# Altium PCB LHCbit.PcbDoc
Units mm, origin at the board's own origin, x right, y up, seen from the top; angles counter-clockwise.
Board outline 51.6 x 44.4 mm, 4 copper layers (Top Layer, Layer 1, Layer 2, Bottom Layer), stack 1.588 mm thick; 50 components, 46 nets, 300 pads, 302 vias.
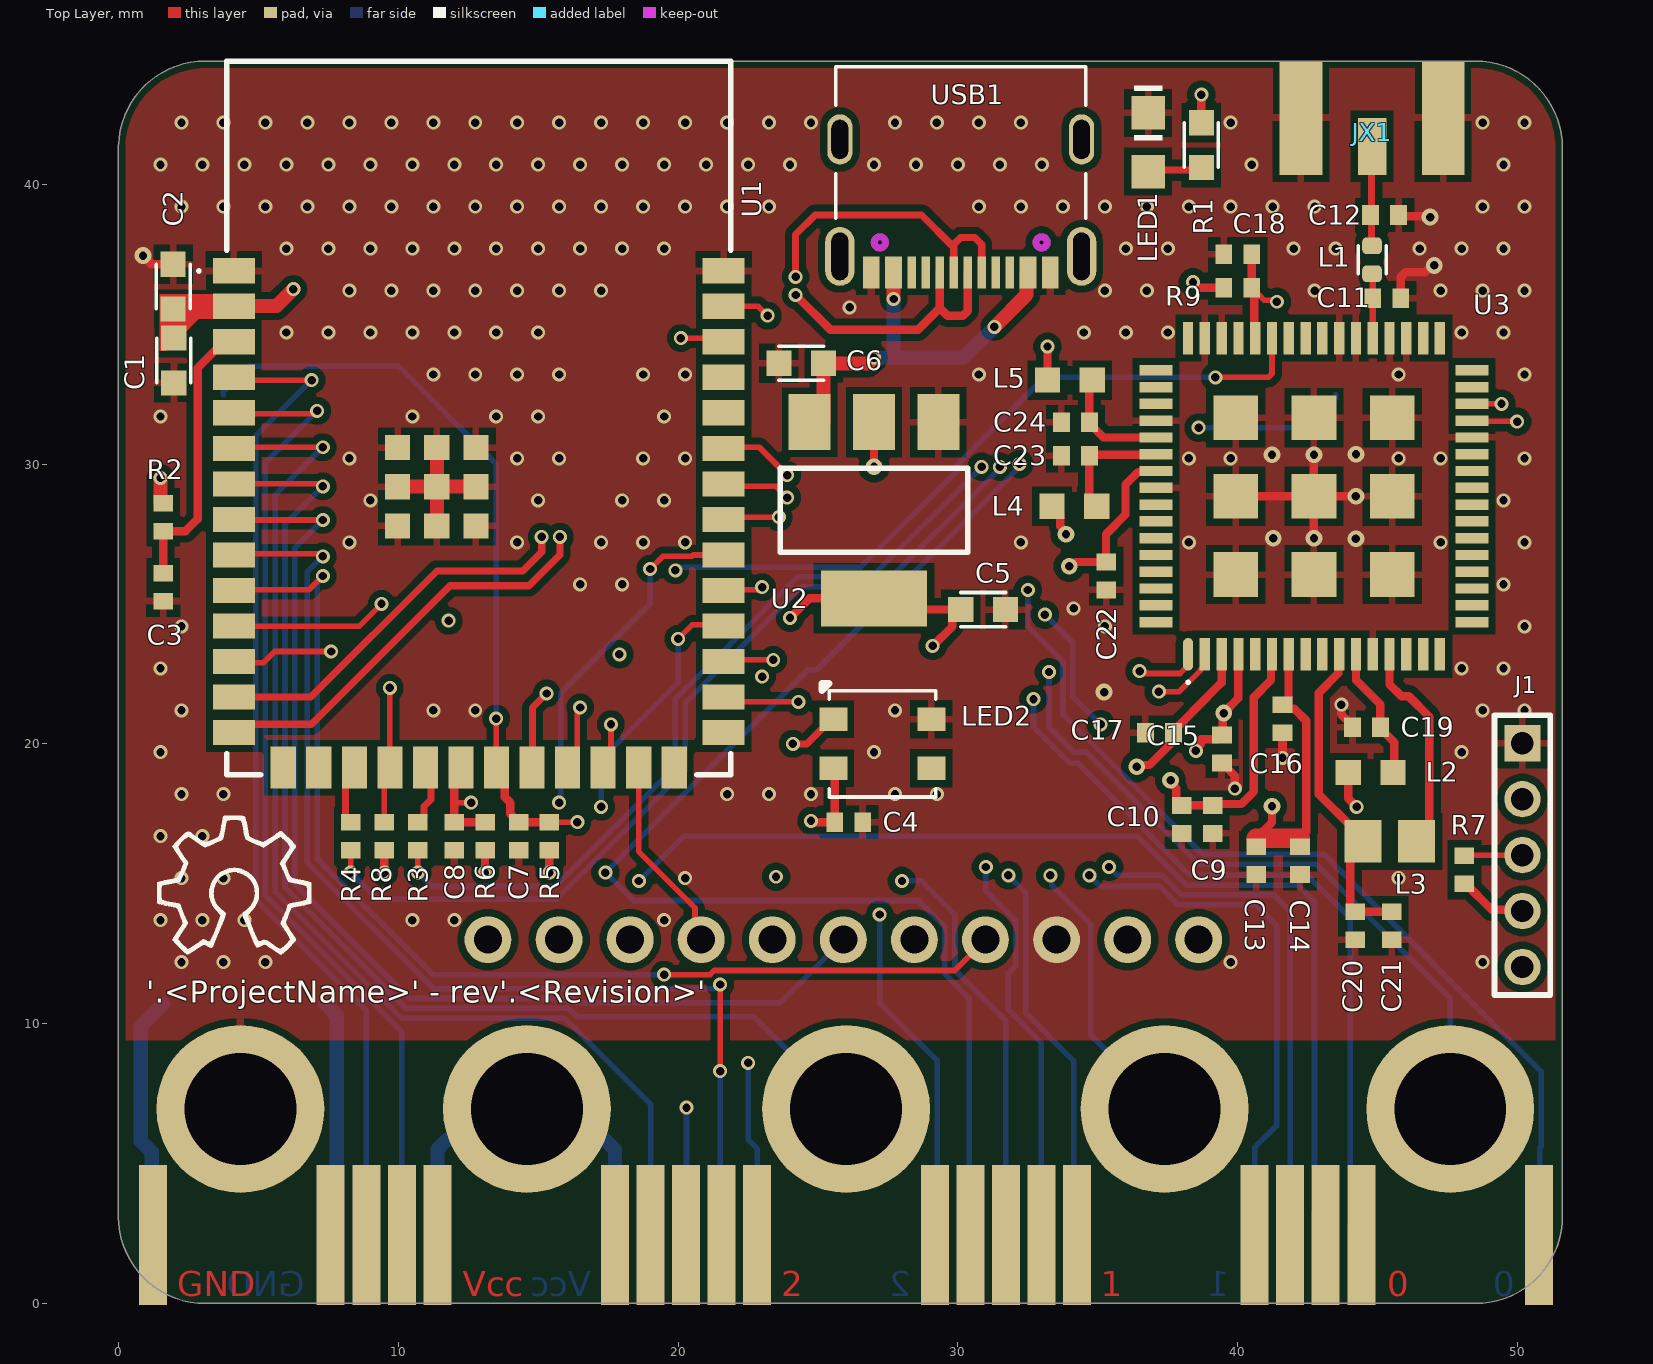
[diagram p0: Top Layer view]
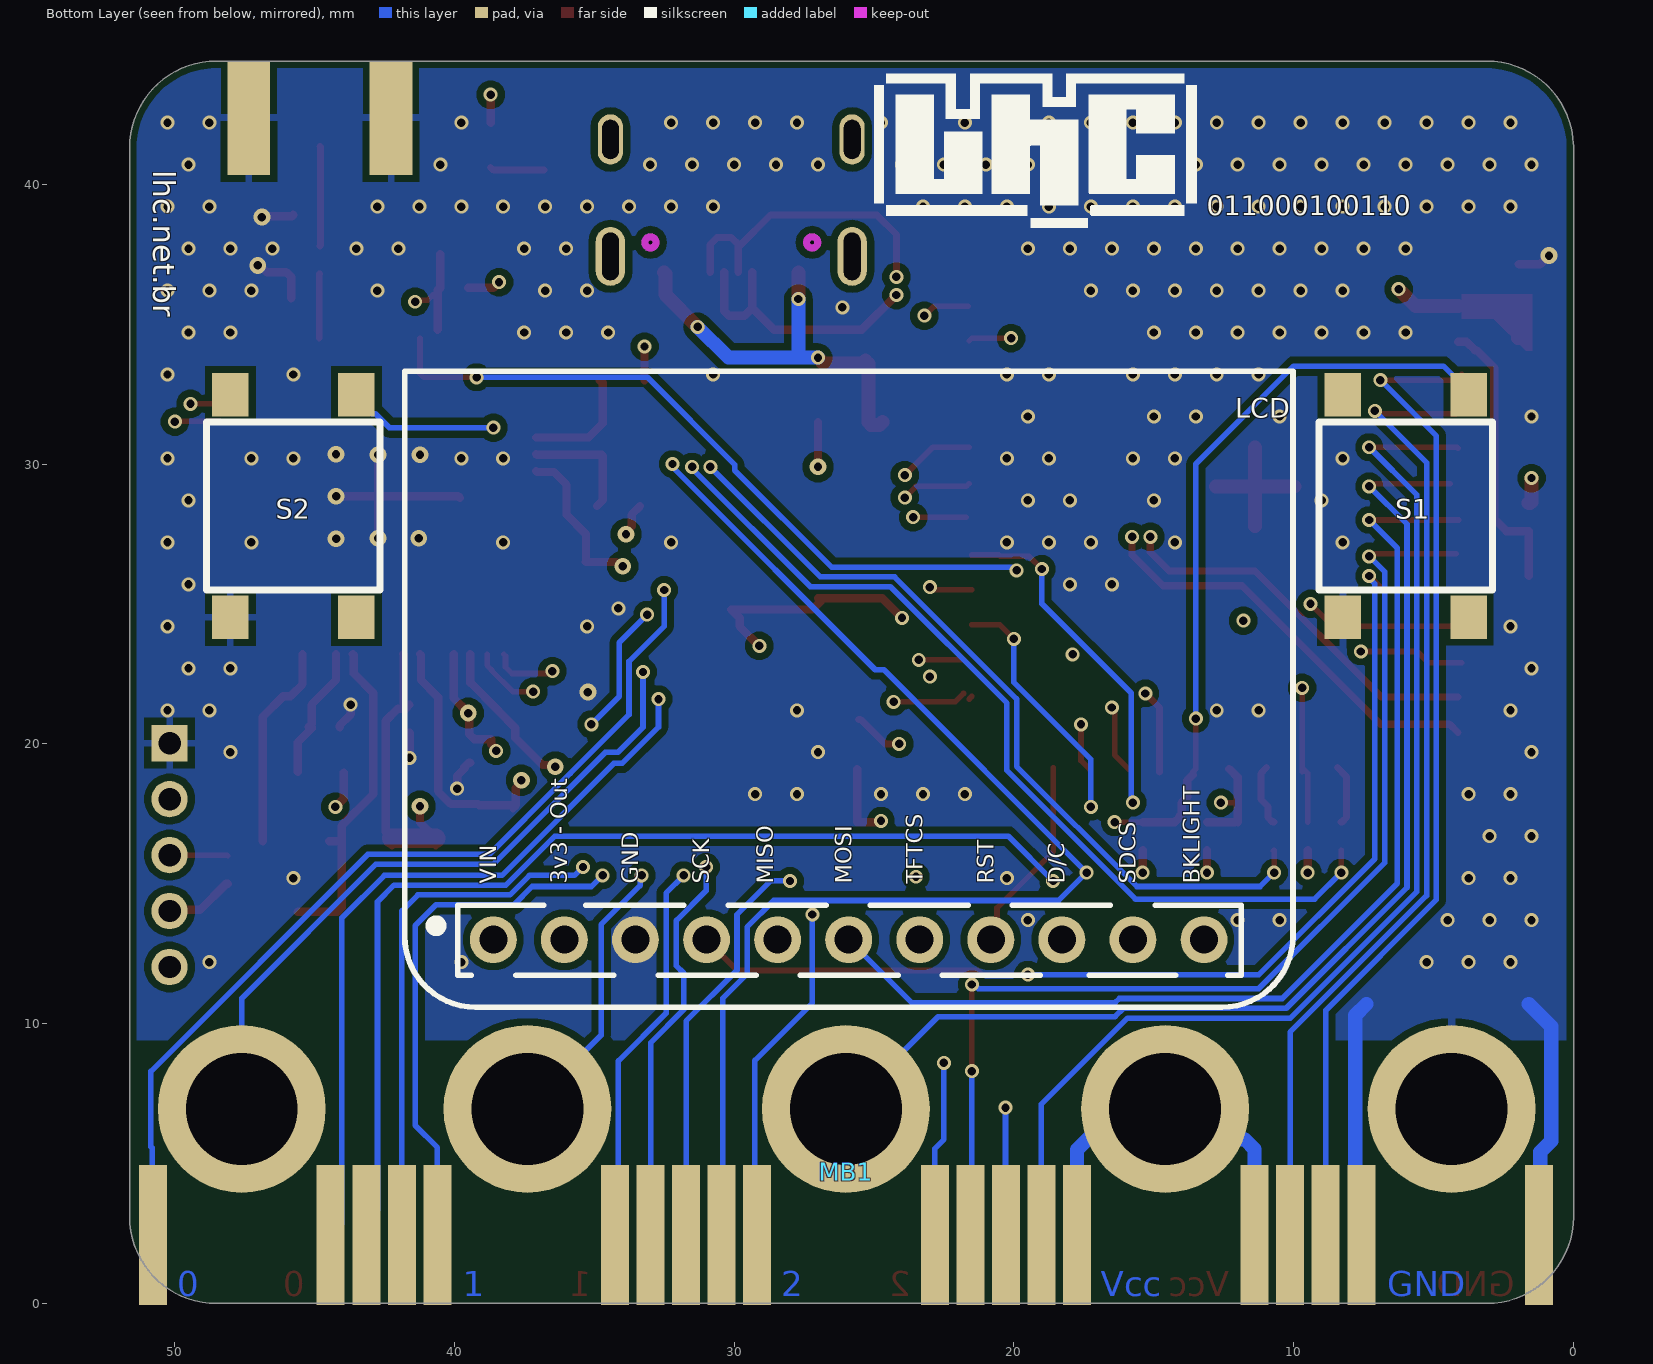
[diagram p1: Bottom Layer view, seen from below]
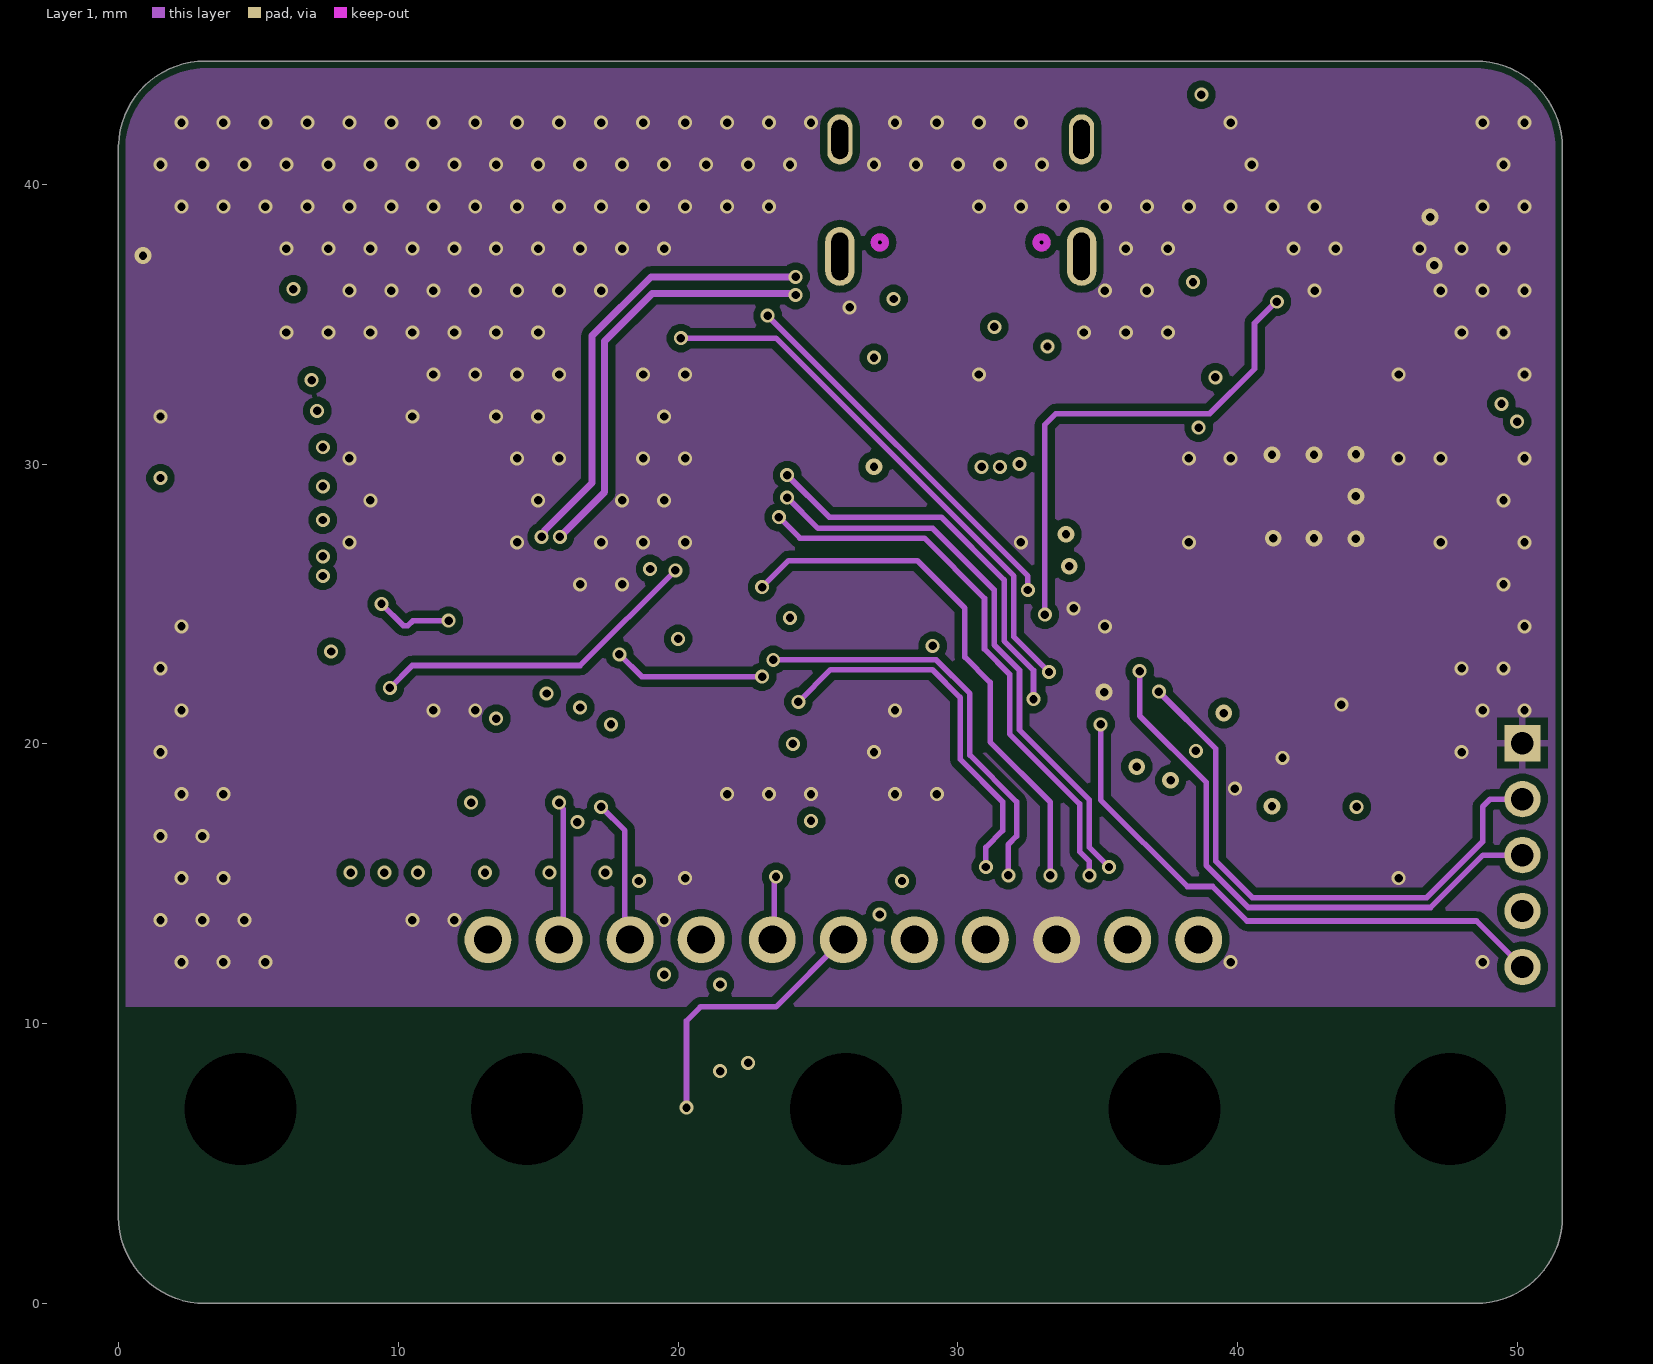
[diagram p2: Layer 1]
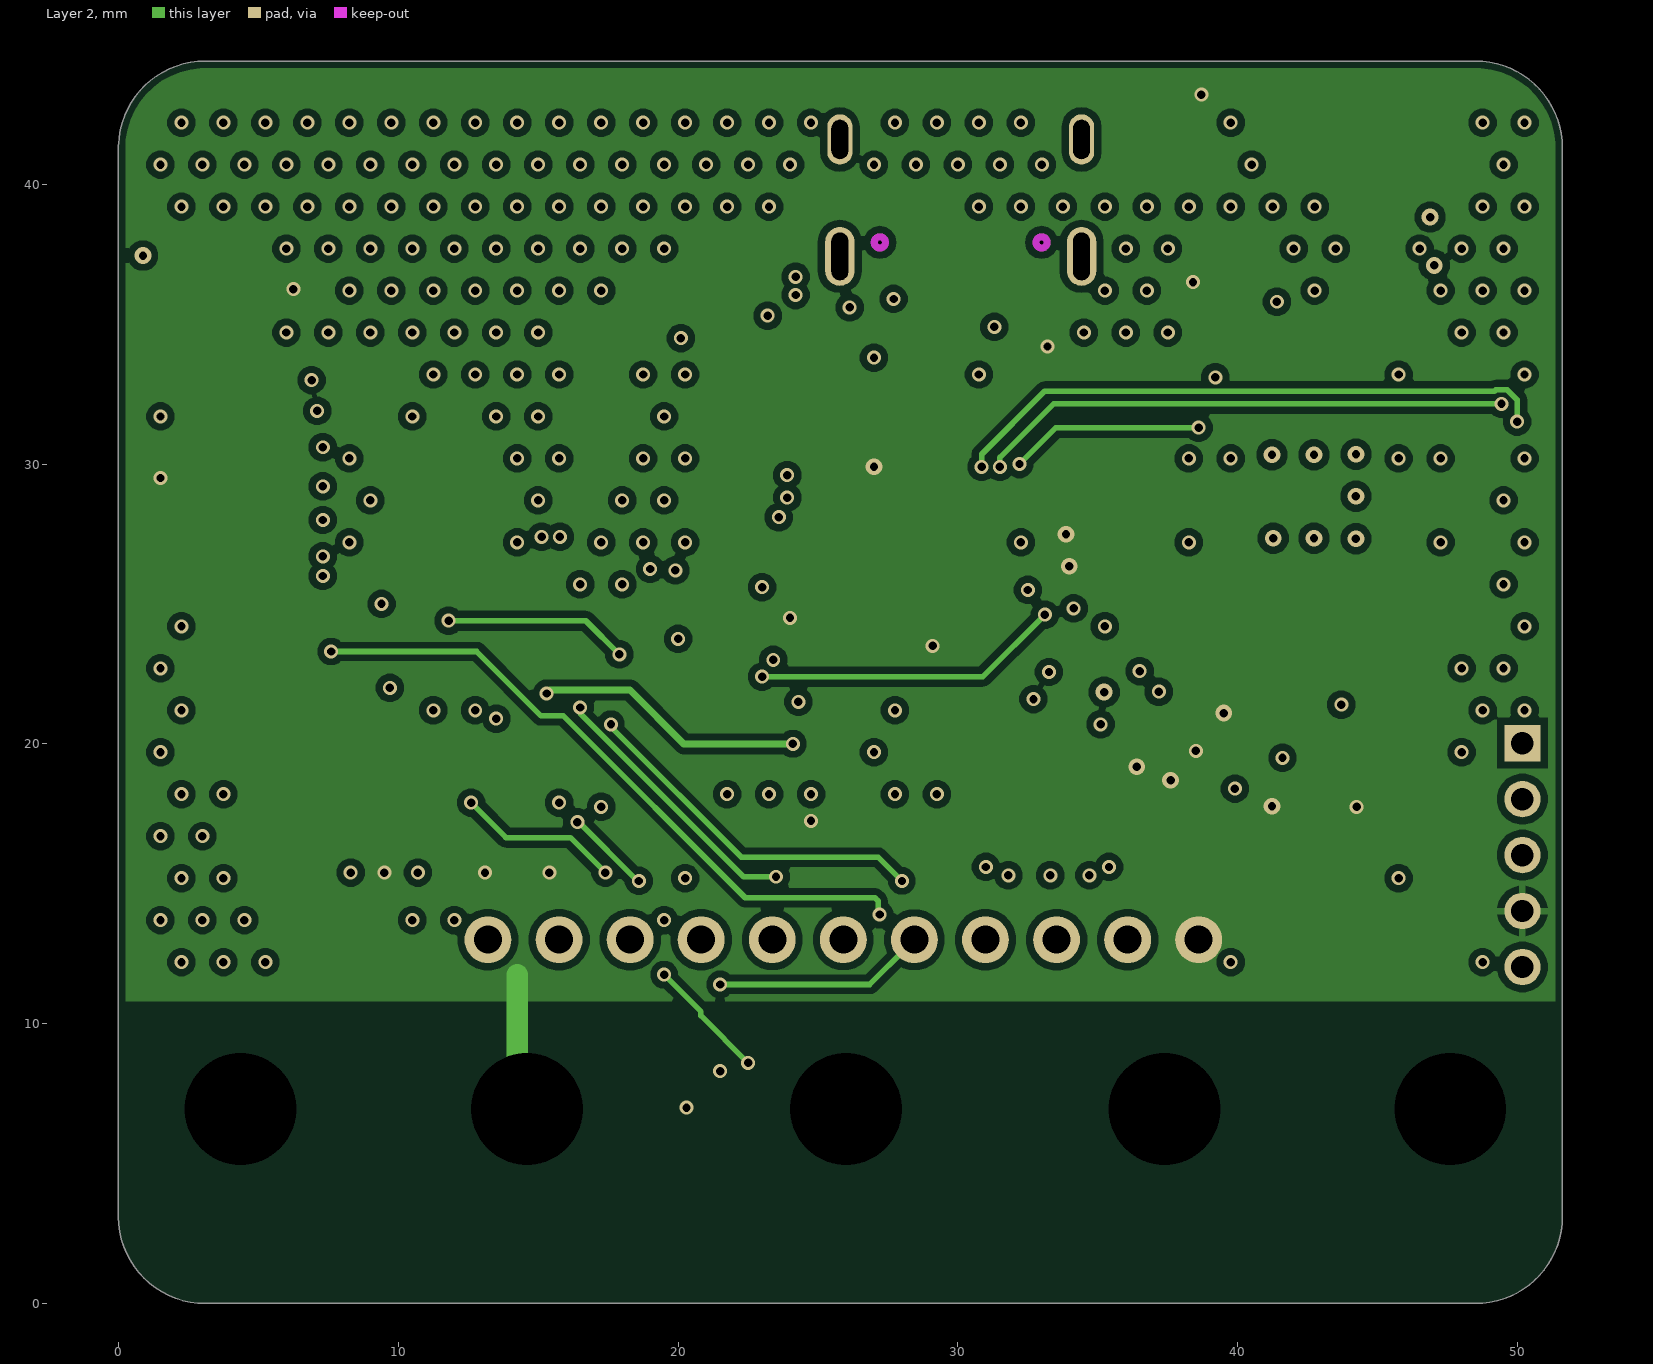
[diagram p3: Layer 2]

## Layer stack, top to bottom
Top Solder: solder mask 0.0254, SM-001, Dk 4
Top Layer: signal copper 0.035
Dielectric 2: prepreg 0.2083, PP-022, Dk 4.5
Layer 1: signal copper 0.018
Dielectric 1: core 1.065, Core-043, Dk 4.3
Layer 2: signal copper 0.018
Dielectric 3: prepreg 0.2083, PP-022, Dk 4.5
Bottom Layer: signal copper 0.035
Bottom Solder: solder mask 0.0254, SM-001, Dk 4

## Board outline
0,3.1 ccw(c3.1,3.1) 3.1,0 48.5,0 ccw(c48.5,3.1) 51.6,3.1 51.6,41.299 51.6,41.3 ccw(c48.5,41.3) 48.5,44.4 3.1,44.4 ccw(c3.1,41.3) 0.002,41.422 0,41.4

## Design rules (kind name [scope] priority, off if disabled: settings)
BoardOutlineClearance [All] p1: gap=0.254 ignorepadtopadclearanceinfootprint=FALSE except(0: Arc-SplitContinuation Track-SplitContinuation SMDPad-OutlineEdge SMDPad-SplitContinuation THPad-SplitContinuation Via-SplitContinuation Fill-SplitContinuation Poly-SplitContinuation Region-SplitContinuation Text-SplitContinuation; 0.1: Track-OutlineEdge Text-OutlineEdge; 0.2: Text-CavityEdge Text-CutoutEdge Text-SplitBarrior)
Clearance RF [InNetClass('50Ohms')] p1: gap=0.152 ignorepadtopadclearanceinfootprint=FALSE except(0: Arc-Hole Track-Hole SMDPad-Hole THPad-Hole Via-Hole Fill-Hole Poly-Hole Region-Hole Text-Hole; 0.127: Arc-Fill Arc-Poly Arc-Region Track-Via Track-Fill Track-Poly Track-Region Track-Text SMDPad-Via SMDPad-Fill SMDPad-Poly SMDPad-Region; 0.254: Track-THPad; 0.305: THPad-Poly Via-Poly Fill-Poly Fill-Region Poly-Poly Poly-Region)
Clearance [All] p2: gap=0.15 ignorepadtopadclearanceinfootprint=FALSE except(0: Arc-Hole Track-Hole SMDPad-Hole THPad-Hole Via-Hole Fill-Hole Poly-Hole Region-Hole Text-Hole; 0.25: Arc-Poly Track-Poly SMDPad-Poly THPad-Poly Via-Poly Fill-Poly Poly-Poly)
DiffPairsRouting [All] p1: maxlimit=0.254 minlimit=0.25 mostfreqgap=0.254 toplayer_prefgap=0.25 toplayer_minwidth=0.25 toplayer_maxwidth=0.25 toplayer_prefwidth=0.25 midlayer1_mingap=0.254 midlayer1_minwidth=0.381 midlayer1_maxwidth=0.381 midlayer1_prefwidth=0.381 midlayer2_mingap=0.254 midlayer2_minwidth=0.381 midlayer2_maxwidth=0.381 midlayer2_prefwidth=0.381 bottomlayer_prefgap=0.25 bottomlayer_minwidth=0.25 bottomlayer_maxwidth=0.25 bottomlayer_prefwidth=0.25 maxuncoupledlength=12.7
HoleSize [IsVia] p1: absolutevalues=TRUE maxlimit=10 minlimit=0.025 maxpercent=80.000 minpercent=20.000
MinimumSolderMaskSliver [All] p1: minsoldermaskwidth=0
PlaneClearance PlaneClearance_RF [InNet('WLAN_RF')] p1: clearance=0.8
PlaneClearance [All] p2: clearance=0.5
PlaneConnect [All] p1: planeconnectstyle=Relief reliefexpansion=0.508 reliefentries=2 reliefconductorwidth=0.254 reliefairgap=0.254
PolygonConnect PolygonConnect_vias [All vs IsVia] p1: connectstyle=Direct reliefconductorwidth=0.254 reliefentries=4 polygonreliefangle="90 Angle" airgapwidth=0.254
PolygonConnect [All] p2: connectstyle=Relief reliefconductorwidth=0.25 reliefentries=4 polygonreliefangle="90 Angle" airgapwidth=0.25
RoutingVias [All] p1: holewidth=0.3 width=0.6 viastyle="Through Hole" minholewidth=0.3 minwidth=0.5 maxholewidth=0.5 maxwidth=0.8 viatemplateguid#1={8426FDED-F5BA-4CAB-9141-54A8BC6DD2D3} viatemplateguid#2={668211A3-BF85-4814-A931-83ECD4CAE96E} viatemplateguid#3={DD99C7B2-69A4-4F03-96B4-6F71CC3A3FCA} viatemplatename#1=v60h30 viatemplatename#2=v50h30 viatemplatename#3=v45h31(1)
SilkToSilkClearance [All] p1: silktosilkclearance=0.001
SilkToSolderMaskClearance [IsPad] p1: minsilkscreentomaskgap=0 clearancetoexposedcopper=TRUE
SolderMaskExpansion SolderMaskExpansion_Vias [IsVia] p1: expansion=-10 istentingtop=FALSE
SolderMaskExpansion [All] p2: expansion=0.1 istentingtop=FALSE
UnpouredPolygon [All] p1: allowunpoured=TRUE allowshelved=TRUE
Width RF_1 [InNetClass('50Ohms')] p1: maxlimit=0.254 minlimit=0.225 preferedwidth=0.254 toplayer_maxwidth=0.225 toplayer_prefwidth=0.225 bottomlayer_maxwidth=0.225 bottomlayer_prefwidth=0.225 impedanceprofiledriven=TRUE impedanceprofileid={D2F659F8-A690-4C51-8CE7-47CDAA934BD5} impedanceprofilevalue=50.000000 minimp=50.000000 maximp=50.000000 favimp=50.000000
Width [All] p2: maxlimit=3.556 minlimit=0.1 preferedwidth=0.2 toplayer_minwidth=0.15 midlayer1_maxwidth=2 midlayer2_maxwidth=2 bottomlayer_minwidth=0.15 minimp=50.000000 maximp=50.000000 favimp=50.000000
22 further rules are at their usual default settings.

## Classes and differential pairs
net class 50Ohms: RF_Output
component class STM32WL_LHCbit: C9 C10 C11 C12 C13 C14 C15 C16 C17 C18 C19 C20 C21 C22 C23 C24 J1 JX1 L1 L2 L3 L4 L5 R7 R8 R9 U3
component class ESP32_LHCbit: C1 C2 C3 C4 C5 C6 C7 C8 LCD LED1 LED2 MB1 R1 R2 R3 R4 R5 R6 S1 S2 U1 U2 USB1

## Components (designator, comment, footprint, x,y, rotation, side; value= is the part's Value field where it differs from the comment)
C1 "C-EUC0603" C0603 1.975,33.7 r270 top value=10uF
C2 "C-EUC0603" C0603 1.953,36.343 r90 top value=100nF
C3 "C-EUC0402" C0402 1.6,25.6 r270 top value=100nF
C4 "C-EUC0402" C0402 26.1,17.2 r180 top value=100nF
C5 "C-EUC0603" C0603 30.9,24.8 r0 top value=1uF
C6 "C-EUC0603" C0603 24.4,33.6 r180 top value=1uF
C7 "C-EUC0402" C0402 14.3,16.7 r270 top value=100nF
C8 "C-EUC0402" C0402 12,16.7 r270 top value=100nF
C9 "C-EUC0402" C0402 39.1,17.3 r270 top value=1uF
C10 "C-EUC0402" C0402 38,17.3 r270 top value=100nF
C11 "C-EUC0402" C0402 45.325,35.925 r180 top value=3.3pF
C12 "C-EUC0402" C0402 45.25,38.9 r180 top value=3.3pF
C13 "C-EUC0402" C0402 40.662,15.826 r270 top value=1uF
C14 "C-EUC0402" C0402 42.225,15.826 r270 top value=100nF
C15 "C-EUC0402" C0402 39.436,19.819 r270 top value=1uF
C16 "C-EUC0402" C0402 41.6,20.9 r270 top value=100nF
C17 "C-EUC0402" C0402 37.2,20.4 r180 top value=4.7uF
C18 "C-EUC0402" C0402 40,37.5 r180 top value=100nF
C19 "C-EUC0402" C0402 44.6,20.6 r180 top value=100nF
C20 "C-EUC0402" C0402 44.2,13.5 r270 top value=470nF
C21 "C-EUC0402" C0402 45.5,13.5 r270 top value=100nF
C22 "C-EUC0402" C0402 35.3,26 r270 top value=100nF
C23 "C-EUC0402" C0402 34.2,30.3 r180 top value=1uF
C24 "C-EUC0402" C0402 34.2,31.5 r180 top value=1uF
J1 "62000511121" 62000511121 50.175,15.025 r270 top value=5
JX1 "SMACONNECTOR_EDGE_UFL" SMA_EDGELAUNCH_UFL 44.8,44.4 r270 top
L1 "Ferrite bead 0402" "L0402 - rounded" 44.8,37.3 r90 top value="8.7 nH"
L2 "Ferrite bead 0603" L0603 44.75,18.975 r0 top value="120 ohm"
L3 "" L0805 45.425,16.512 r0 top value=15uH
L4 "Ferrite bead 0603" L0603 34.163,28.49 r0 top value="120 ohm"
L5 "Ferrite bead 0603" L0603 34,33 r0 top value="120 ohm"
LCD "Adafruit 0.96\"  TFT LCD" "ADafruit 0.96 Display" 25.9,13 r180 bottom
LED1 "" CHIPLED_0805 36.8,41.5 r0 top
LED2 "SK6812MINI_NOPoly" WS2812BMINI_no_poly 27.3,20 r180 top
MB1 "MICRO:BIT_EDGE" MICROBIT_EDGE 26,0 r180 bottom
R1 "R-US_R0603" R0603 38.7,41.4 r90 top value=470
R2 "R-US_R0402" R0402 1.6,28.1 r90 top value=10k
R3 "R-US_R0402" R0402 10.7,16.7 r270 top value=0
R4 "R-US_R0402" R0402 8.3,16.7 r270 top value=0
R5 "R-US_R0402" R0402 15.4,16.7 r270 top value=10k
R6 "R-US_R0402" R0402 13.1,16.7 r270 top value=10k
R7 "R-US_R0402" R0402 48.1,15.5 r270 top value=10k
R8 "R-US_R0402" R0402 9.5,16.7 r270 top value=10k
R9 "R-US_R0402" R0402 40,36.3 r180 top value=10k
S1 "DTSM-6" 4301x20438x6_6x6x4.3_DTSM-6 6,28.5 r90 bottom
S2 "DTSM-6" 4301x20438x6_6x6x4.3_DTSM-6 45.75,28.5 r90 bottom locked
U1 "ESP32-S3-WROOM-1" ESP32S3WROOM1N16R2 12.875,31.65 r0 top locked
U2 "NCP1117LP" SOT223 27,31.5 r270 top
U3 "RAK3172-SiP" RAK3172SiP 42.725,28.85 r90 top
USB1 "USB-Type-C-12402012E212A" AMPHENOL_12402012E212A 30.1,41.6 r180 top

## Footprints (in the part's own frame and the unit in brackets; to place one, negate y for a bottom-side part, rotate by r counter-clockwise, add the part's x,y. Pads: shape width x height; smd on the part's side, far side on the other; paste and mask are expansions set on the pad)
4301x20438x6_6x6x4.3_DTSM-6 [mm] "6x6mm Tact Switch, SMD version"
  rect 1.55x1.3 smd: 1(-3.975,2.25) 2(3.975,2.25) 3(-3.975,-2.25) 4(3.975,-2.25)
  silkscreen extent -3,-3.1 3,3.1, body extent -4.5,-3.1 4.5,3.1, height 4.32
62000511121 [mm] "2.00 mm THT Pin Header, 6p"
  rect 1.3x1.3 hole 0.8: 1(-5,0)
  round 1.3 hole 0.8: 2(-3,0) 3(-1,0) 4(1,0) 5(3,0)
  silkscreen extent -6,-1 4,1, body extent -6,-1 4,1, height 6.05
"ADafruit 0.96 Display" [mm]
  round 1.676 hole 1: 1(-12.705,0) 2(-10.165,0) 3(-7.625,0) 4(-5.085,0) 5(-2.545,0) 6(-0.005,0) 7(2.535,0) 8(5.075,0) 9(7.615,0) 10(10.155,0) 11(12.695,0)
  Top Layer lines w0.254: 5.075,0 4.948,0.127
  Bottom Layer lines w0.254: -10.165,0 -10.292,0.127
  silkscreen extent -15.87,-2.41 15.88,20.32, body extent -15.87,-2.41 15.88,25.39, height 5.47
AMPHENOL_12402012E212A [mm]
  rect 0.6x1.14 smd: A1_B12(-3.2,4.75) A4_B9(-2.4,4.75) B1_A12(3.2,4.75) B4_A9(2.4,4.75)
  rect 0.3x1.14 smd: A5(-1.25,4.75) A6(-0.25,4.75) A7(0.25,4.75) A8(1.25,4.75) B5(1.75,4.75) B6(0.75,4.75) B7(-0.75,4.75) B8(-1.75,4.75)
  oval 1.05x2.1 hole 0.6 slot 1.7 at 90 deg: SH1(-4.32,4.18) SH2(4.32,4.18)
  oval 0.9x1.8 hole 0.6 slot 1.4 at 90 deg: SH3(-4.32,0) SH4(4.32,0)
  round 0.65 hole 0.65 unplated: ""(-2.89,3.68) ""(2.89,3.68)
  silkscreen extent -4.47,-2.6 4.47,2.81, body extent -4.47,-2.6 4.47,5, height 3.26
C0402 [mm]
  rect 0.6x0.7 smd: 1(-0.5,0) 2(0.5,0)
  body extent -0.5,-0.26 0.5,0.27, height 0.36
C0603 [mm]
  rect 0.9x0.9 smd: 1(-0.8,0) 2(0.8,0)
  silkscreen extent -0.8,-0.61 0.8,0.61, body extent -0.8,-0.4 0.8,0.4, height 0.8
CHIPLED_0805 [mm]
  rect 1.2x1.2 smd: A(0,-1.05) C(0,1.05)
  silkscreen extent -0.51,0.05 0.51,2.03, body extent -0.63,-1 0.62,1, height 0.81
ESP32S3WROOM1N16R2 [mm]
  rect 1.5x0.9 smd: 1(-8.75,5.26) 2(-8.75,3.99) 3(-8.75,2.72) 4(-8.75,1.45) 5(-8.75,0.18) 6(-8.75,-1.09) 7(-8.75,-2.36) 8(-8.75,-3.63) 9(-8.75,-4.9) 10(-8.75,-6.17) 11(-8.75,-7.44) 12(-8.75,-8.71) 13(-8.75,-9.98) 14(-8.75,-11.25) 27(8.75,-11.25) 28(8.75,-9.98) 29(8.75,-8.71) 30(8.75,-7.44) 31(8.75,-6.17) 32(8.75,-4.9) 33(8.75,-3.63) 34(8.75,-2.36) 35(8.75,-1.09) 36(8.75,0.18) 37(8.75,1.45) 38(8.75,2.72) 39(8.75,3.99) 40(8.75,5.26)
  rect 0.9x1.5 smd: 15(-6.985,-12.5) 16(-5.715,-12.5) 17(-4.445,-12.5) 18(-3.175,-12.5) 19(-1.905,-12.5) 20(-0.635,-12.5) 21(0.635,-12.5) 22(1.905,-12.5) 23(3.175,-12.5) 24(4.445,-12.5) 25(5.715,-12.5) 26(6.985,-12.5)
  rect 0.9x0.9 smd: 41(-1.5,-2.46) 42(-1.5,-1.06) 43(-2.9,-1.06) 44(-2.9,-2.46) 45(-2.9,-3.86) 46(-1.5,-3.86) 47(-0.1,-3.86) 48(-0.1,-2.46) 49(-0.1,-1.06)
  silkscreen extent -10.05,-12.75 9,12.75, body extent -9.01,-12.91 9.01,12.6, height 3.11
"L0402 - rounded" [mm]
  rrect50% 0.6x0.7 smd: 1(-0.5,0) 2(0.5,0)
  silkscreen extent -0.5,-0.5 0.5,0.5, body extent -0.5,-0.26 0.5,0.27, height 0.36
L0603 [mm]
  rect 0.9x0.9 smd: 1(-0.8,0) 2(0.8,0)
  Top Layer pour cut-out: -0.3,0.5 0.3,0.5 0.3,-0.5 -0.3,-0.5
  body extent -0.8,-0.4 0.8,0.4, height 0.8
L0805 [mil]
  rect 52x60 smd: 1(-37.4,0) 2(38,0)
  body extent -39,-24 39,24, height 37
MICROBIT_EDGE [mm]
  rect 1x5 smd paste+0 mask+0: GND(18.415,2.45) GND(24.765,2.45) P3(-24.765,2.45) P4(-18.415,2.45) P5(-17.145,2.45) P6(-15.875,2.45) P7(-14.605,2.45) P8(-8.255,2.45) P9(-6.985,2.45) P10(-5.715,2.45) P11(-4.445,2.45) P12(-3.175,2.45) P13(3.175,2.45) P14(4.445,2.45) P15(5.715,2.45) P16(6.985,2.45) P19(15.875,2.45) P20(17.145,2.45) Vcc(8.255,2.45) Vcc(14.605,2.45)
  round 6 / inner round 0 / far side round 6 hole 4: GND(21.645,6.95) P0(-21.595,6.95) P1(-11.385,6.95) P2(-0.005,6.95) Vcc(11.405,6.95)
  rect 1x5 smd far side paste+0 mask+0: ""(-24.765,2.45) ""(-18.415,2.45) ""(-17.145,2.45) ""(-15.875,2.45) ""(-14.605,2.45) ""(-8.255,2.45) ""(-6.985,2.45) ""(-5.715,2.45) ""(-4.445,2.45) ""(-3.175,2.45) ""(3.175,2.45) ""(4.445,2.45) ""(5.715,2.45) ""(6.985,2.45) ""(8.255,2.45) ""(14.605,2.45) ""(15.875,2.45) ""(17.145,2.45) ""(18.415,2.45) ""(24.765,2.45)
R0402 [mm]
  rect 0.6x0.7 smd: 1(-0.5,0) 2(0.5,0)
  body extent -0.5,-0.25 0.5,0.25, height 0.35
R0603 [mm]
  rect 0.9x0.9 smd: 1(-0.8,0) 2(0.8,0)
  silkscreen extent -0.8,-0.61 0.8,0.61, body extent -0.77,-0.42 0.78,0.43, height 0.45
RAK3172SiP [mm]
  rrect100% 1.17x0.37 smd: 1(-5.65,4.5)
  rect 1.17x0.37 smd: 2(-5.65,3.9) 3(-5.65,3.3) 4(-5.65,2.7) 5(-5.65,2.1) 6(-5.65,1.5) 7(-5.65,0.9) 8(-5.65,0.3) 9(-5.65,-0.3) 10(-5.65,-0.9) 11(-5.65,-1.5) 12(-5.65,-2.1) 13(-5.65,-2.7) 14(-5.65,-3.3) 15(-5.65,-3.9) 16(-5.65,-4.5) 33(5.65,-4.5) 34(5.65,-3.9) 35(5.65,-3.3) 36(5.65,-2.7) 37(5.65,-2.1) 38(5.65,-1.5) 39(5.65,-0.9) 40(5.65,-0.3) 41(5.65,0.3) 42(5.65,0.9) 43(5.65,1.5) 44(5.65,2.1) 45(5.65,2.7) 46(5.65,3.3) 47(5.65,3.9) 48(5.65,4.5)
  rect 0.37x1.17 smd: 17(-4.5,-5.65) 18(-3.9,-5.65) 19(-3.3,-5.65) 20(-2.7,-5.65) 21(-2.1,-5.65) 22(-1.5,-5.65) 23(-0.9,-5.65) 24(-0.3,-5.65) 25(0.3,-5.65) 26(0.9,-5.65) 27(1.5,-5.65) 28(2.1,-5.65) 29(2.7,-5.65) 30(3.3,-5.65) 31(3.9,-5.65) 32(4.5,-5.65) 49(4.5,5.65) 50(3.9,5.65) 51(3.3,5.65) 52(2.7,5.65) 53(2.1,5.65) 54(1.5,5.65) 55(0.9,5.65) 56(0.3,5.65) 57(-0.3,5.65) 58(-0.9,5.65) 59(-1.5,5.65) 60(-2.1,5.65) 61(-2.7,5.65) 62(-3.3,5.65) 63(-3.9,5.65) 64(-4.5,5.65)
  rect 1.6x1.6 smd: 65(-2.8,2.8) 66(0,2.8) 67(2.8,2.8) 68(-2.8,0) 69(0,0) 70(2.8,0) 71(-2.8,-2.8) 72(0,-2.8) 73(2.8,-2.8)
  silkscreen extent -6.7,4.45 -6.6,4.55, body extent -6,-6 6,6, height 1.32
SMA_EDGELAUNCH_UFL [mil]
  rect 160x60 smd paste-80: GND@1(80,-100) GND@2(80,100)
  rect 160x60 smd far side paste-80: GND@3(80,100) GND@4(80,-100)
  rect 80x40 smd paste-40: P(120,0)
  body extent -500,-125 185,125, height 140
SOT223 [mm] "SOT223, 4-Leads"
  rect 2x1.5 smd: 1(0,2.3) 2(0,0) 3(0,-2.3)
  rect 2x3.8 smd: 4(6.3,0)
  silkscreen extent 1.65,-3.35 4.65,3.35, body extent -0.32,-3.35 6.98,3.35, height 1.7
WS2812BMINI_no_poly [mm]
  rect 1x0.85 smd: 1(-1.75,0.875) 2(-1.75,-0.875) 3(1.75,-0.875) 4(1.75,0.875)
  silkscreen extent -1.9,-2.16 2.16,1.9, body extent -1.85,-1.75 1.85,1.75, height 1

## Part data
C1: Part Number=CL10A106KP8NNNC, Família=Capacitor, Vendor=Samsung
C2: Part Number=CC0603KRX7R9BB104, Família=Capacitor, Vendor=YAGEO
C3 C4 C7 C8 C10 C14 C16 C18 C19 C21 C22: Part Number=C0402C104K8, Família=Capacitor, Vendor=KEMET
C5 C6: Part Number=CL10A105KO8NNNC, Família=Capacitor, Vendor=Samsung
C9 C13 C15 C23 C24: Part Number=CL05A105KA5NQNC, Família=Capacitor, Vendor=Samsung
C11 C12: Part Number=GRM1555C1H3R3WA01D, Família=Capacitor, Vendor=Murata
C17: Part Number=CL05A475MQ5NRNC, Família=Capacitor, Vendor=Samsung
C20: Part Number=GRM155R61H474KE11D, Família=Capacitor, Vendor=Murata
J1: "WR-PHD 2.00 mm THT Pin Header, 6p", Família=Connector, Part Number=62000511121, Vendor="Wurth Elektronik"
JX1: Part Number=SMA-J-P-H-ST-EM1, Família=Connector, Vendor=SAMTECH
L1: library part L-US0402, Part Number=LQW15AN8N7G00D, Família=Inductor, Vendor=Murata
L2 L4 L5: library part L-US0603, Part Number=YI160808U121-2R5T, Família=Inductor, Vendor=YJYCOIN
L3: library part L-US0805, Part Number=MLZ2012M150WTD25, Família=Inductor, Vendor=TDK
LED1: library part LEDCHIPLED_0805, Part Number=AP2012EC, Família=LED, Vendor=Kingbright
LED2: "SMD RGB (WS2812/SK6812MINI) 3535", Part Number=SK6812MINI, Família=LED
R1: Part Number=RC0603FR-07470RL, Vendor=Yageo
R2 R5 R6 R7 R8 R9: Part Number=RC0402FR-0710KL, Família=Resistor, Vendor=YAGEO
R3 R4: Part Number=PA0402-R-070RL, Família=Resistor, Vendor=YAGEO
S1 S2: "WS-TASV 6x6mm Tact Switch, SMD version", Família=Switches, Part Number=DTSM-6, Vendor="Wurth Elektronik"
U1: "Integrated Circuit", Part Number=ESP32-S3-WROOM-1-N16R2, Família=IC, Vendor=Espressif
U2: Part Number=TLV1117LV33DCYR, Vendor="Texas Instruments"
U3: "Integrated Circuit", Part Number=RAK3172-SIP-9-SM-NI, Família=IC, Vendor=RAK
USB1: "USB2.0, Type C", Part Number=TYPEC-304-ACP16, Família=Connector, Vendor=XUNPU

## Via types
v1: diameter 0.5, hole 0.3, Top Layer to Bottom Layer, tented both sides, 194 vias
v2: diameter 0.5, hole 0.3, Top Layer to Bottom Layer, 90 vias
v3: diameter 0.6, hole 0.3, Top Layer to Bottom Layer, 17 vias
v4: diameter 0.6, hole 0.3, Top Layer to Bottom Layer, tented both sides, 1 vias

## Nets (pads, with @x,y where several pads share a name; then routed paths per layer and width w, separated by ;. In a path a pad name is that pad's centre, name@x,y a point inside that pad or via, vN(x,y) a via of type N, cw(c..) or ccw(c..) an arc to the next point about the centre after c; other vN are vias at no path point)
BOOT_STM32: R8.1 U1.18 U3.43 | length 42.6
  Top Layer w0.2: R8.1 9.5,18.95 U1.18 ; U1.18@9.7,19 U1.18 ; v2(9.7,22) U1.18 ; v2(39.2,33.1) 41.1,33.1 41.225,33.225 U3.43
  Layer 1 w0.2: v2(9.7,22) 10.5,22.8 16.5,22.8 v2(19.9,26.2)
  Bottom Layer w0.2: v2(19.9,26.2) 19.981,26.2 20.097,26.316 26.516,26.316 29.979,29.779 29.979,29.979 33.1,33.1 v2(39.2,33.1)
CS: MB1.P16 U1.6 | length 41
  Top Layer w0.2: U1.6 4.165,30.6 v2(7.3,30.6)
  Bottom Layer w0.2: v2(7.3,30.6) 5.6,28.9 5.6,14.72 10.12,10.2 15.941,10.2 19.015,7.126 MB1.P16
D+: U1.14 USB1.A6 USB1.B6 | length 40
  Top Layer w0.254: U1.14 4.425,20.7 6.9,20.7 11.85,25.65 14.668,25.65 15.775,26.757 v2(15.775,27.4)
  Top Layer w0.3: v2(24.2,36.04) 25.44,34.8 28.574,34.8 29.35,35.576 ; USB1.B6 29.35,35.576 ; USB1.A6 30.35,35.476 30.174,35.3 29.626,35.3 29.35,35.576
  Layer 1 w0.254: v2(15.775,27.4) 17.375,29 17.375,34.4 19.075,36.1 24.14,36.1 v2(24.2,36.04)
D-: U1.13 USB1.A7 USB1.B7 | length 40.9
  Top Layer w0.254: U1.13 6.87,21.67 11.38,26.18 14.448,26.18 15.125,26.857 v2(15.125,27.4) ; v2@24.2,36.7 24.2,38.2 24.9,38.9 28.7,38.9 29.8,37.8 ; USB1.A7 29.85,37.75 29.8,37.8 ; USB1.B7 30.85,37.85 30.6,38.1 30.1,38.1 29.8,37.8
  Layer 1 w0.254: v2(15.125,27.4) 15.125,27.454 15.225,27.554 15.225,27.628 15.547,27.95 16.925,29.328 16.925,34.586 19.029,36.69 v2(24.2,36.69)
DC: LCD.9 U1.30 | length 14
  Top Layer w0.2: v2(20,23.75) 20.5,24.25 U1.30@21.5,24.25
  Layer 1 w0.2: v2(17.25,17.75) 18.1,16.9 18.1,13.185 LCD.9
  Bottom Layer w0.2: v2(17.25,17.75) 17.25,19.447 20,22.197 v2(20,23.75)
EN: C3.1 R2.1 U1.3 | length 10.1
  Top Layer w0.3: R2.1 2.4,27.6 2.829,28.03 2.829,33.428 3.471,34.07 3.525,34.07 3.825,34.37 U1.3 ; C3.1@1.6,26 R2.1
ESP_UART1_RX: R3.1 U1.19 | length 2.3
  Top Layer w0.254: R3.1 10.75,17.2 10.923,17.373 10.923,17.758 11.173,18.008 11.173,18.947 U1.19
ESP_UART1_TX: R4.1 U1.17 | length 2.2
  Top Layer w0.254: R4.1 8.28,17.2 8.107,17.373 8.107,18.827 U1.17
GND: C1.2 C2.2 C3.2 C4.1 C5.2 C6.2 C7.2 C8.2 C9.2 C10.2 C11.1 C12.1 C13.2 C14.2 C15.2 C16.2 C17.2 C18.2 C19.2 C20.2 C21.2 C22.2 C23.2 C24.2 J1.1 JX1.GND@1 JX1.GND@2 JX1.GND@3 JX1.GND@4 LCD.3 LED1.C LED2.2 MB1.GND S1.1 S2.1 U1.1 U1.40 U1.41 U1.42 U1.43 U1.44 U1.45 U1.46 U1.47 U1.48 U1.49 U2.1 U3.12 U3.28 U3.35 U3.36 U3.38 U3.39 U3.46 U3.47 U3.52 U3.56 U3.65 U3.66 U3.67 U3.68 U3.69 U3.70 U3.71 U3.72 U3.73 USB1.A1_B12 USB1.B1_A12 | length 38
  Top Layer w0.305: v3(0.875,37.45) 0.883,37.45 1.19,37.143 C2.2 ; C15.2 39.486,19.319 39.634,19.172 39.634,19.122 39.9,18.855 v2(39.9,18.4) ; U3.66@39.8,28.8 39.85,28.85 U3.66 U3.69 ; v2(41.6,19.5) C16.2 ; v3@42.6,30.4 42.725,30.275 U3.69 ; v3@42.7,27.3 42.725,27.325 v3(42.725,27.35) U3.69 ; v2(43.7,21.4) 43.7,21.05 44.1,20.65 C19.2 ; v3@44.2,28.8 44.15,28.85 U3.69 ; C12.1 45.788,38.862 46.838,38.862 v3(46.875,38.825) ; C11.1 45.825,36.682 46.004,36.861 46.706,36.861 46.945,37.1 v3(47.025,37.1)
  Top Layer w0.5: U1.44 U1.41 ; U1.46 U1.41 ; U1.42 U1.41 ; U1.48 U1.41
  Bottom Layer w0.508: MB1.GND@1.235,2.45 1.186,2.5 1.186,5.414 0.796,5.804 0.796,9.896 1.6,10.7 ; 7.4,10.7 7.8,10.3 7.8,2.665 MB1.GND@7.585,2.45
  other v1: 2.25,12.2 3.75,12.2 5.25,12.2 39.75,12.2 48.75,12.2 1.5,13.7 3,13.7 4.5,13.7 10.5,13.7 12,13.7 19.5,13.7 2.25,15.2 3.75,15.2 20.25,15.2 45.75,15.2 1.5,16.7 3,16.7 2.25,18.2 3.75,18.2 21.75,18.2 23.25,18.2 24.75,18.2 27.75,18.2 29.25,18.2 1.5,19.7 27,19.7 48,19.7 2.25,21.2 11.25,21.2 12.75,21.2 27.75,21.2 48.75,21.2 50.25,21.2 1.5,22.7 48,22.7 49.5,22.7 2.25,24.2 35.25,24.2 50.25,24.2 16.5,25.7 18,25.7 49.5,25.7 8.25,27.2 14.25,27.2 17.25,27.2 18.75,27.2 20.25,27.2 32.25,27.2 38.25,27.2 47.25,27.2 50.25,27.2 9,28.7 15,28.7 18,28.7 19.5,28.7 49.5,28.7 8.25,30.2 14.25,30.2 15.75,30.2 18.75,30.2 20.25,30.2 38.25,30.2 39.75,30.2 45.75,30.2 47.25,30.2 50.25,30.2 1.5,31.7 10.5,31.7 13.5,31.7 15,31.7 19.5,31.7 11.25,33.2 12.75,33.2 14.25,33.2 15.75,33.2 18.75,33.2 20.25,33.2 30.75,33.2 45.75,33.2 50.25,33.2 6,34.7 7.5,34.7 9,34.7 10.5,34.7 12,34.7 13.5,34.7 15,34.7 34.5,34.7 36,34.7 37.5,34.7 48,34.7 49.5,34.7 8.25,36.2 9.75,36.2 11.25,36.2 12.75,36.2 14.25,36.2 15.75,36.2 17.25,36.2 35.25,36.2 36.75,36.2 42.75,36.2 47.25,36.2 48.75,36.2 50.25,36.2 6,37.7 7.5,37.7 9,37.7 10.5,37.7 12,37.7 13.5,37.7 15,37.7 16.5,37.7 18,37.7 19.5,37.7 36,37.7 37.5,37.7 42,37.7 43.5,37.7 46.5,37.7 48,37.7 49.5,37.7 2.25,39.2 3.75,39.2 5.25,39.2 6.75,39.2 8.25,39.2 9.75,39.2 11.25,39.2 12.75,39.2 14.25,39.2 15.75,39.2 17.25,39.2 18.75,39.2 20.25,39.2 21.75,39.2 23.25,39.2 30.75,39.2 32.25,39.2 33.75,39.2 35.25,39.2 36.75,39.2 38.25,39.2 39.75,39.2 41.25,39.2 42.75,39.2 48.75,39.2 50.25,39.2 1.5,40.7 3,40.7 4.5,40.7 6,40.7 7.5,40.7 9,40.7 10.5,40.7 12,40.7 13.5,40.7 15,40.7 16.5,40.7 18,40.7 19.5,40.7 21,40.7 22.5,40.7 24,40.7 27,40.7 28.5,40.7 30,40.7 31.5,40.7 33,40.7 40.5,40.7 49.5,40.7 2.25,42.2 3.75,42.2 5.25,42.2 6.75,42.2 8.25,42.2 9.75,42.2 11.25,42.2 12.75,42.2 14.25,42.2 15.75,42.2 17.25,42.2 18.75,42.2 20.25,42.2 21.75,42.2 23.25,42.2 24.75,42.2 27.75,42.2 29.25,42.2 30.75,42.2 32.25,42.2 39.75,42.2 48.75,42.2 50.25,42.2
  other v2: 34.137,24.841 26.131,35.597
  other v3: 35.225,21.85 44.225,27.331 41.272,27.35 44.225,28.85 41.225,30.33 42.725,30.33 44.225,30.35
LED_RGB: LED2.3 U1.22 | length 14.5
  Top Layer w0.254: U1.22@14.8,19 14.8,21.3 v2(15.3,21.8) ; v2(24.1,20) 24.6,20 25.475,20.875 LED2.3
  Layer 2 w0.254: v2(15.3,21.8) 15.423,21.923 18.277,21.923 20.2,20 v2(24.1,20)
LORA_RX: R4.2 U3.30 | length 52.3
  Top Layer w0.2: v2(8.3,15.4) R4.2@8.3,16.2 ; U3.30 48.377,32.152 v2(49.425,32.152)
  Layer 2 w0.2: v2(31.5,29.9) 31.5,30.234 33.418,32.152 v2(49.425,32.152)
  Bottom Layer w0.2: v2(8.3,15.4) 9.25,14.45 15.652,14.45 20.252,19.05 20.252,21.459 24.409,25.616 27.273,25.616 31.5,29.843 v2(31.5,29.9)
LORA_TX: R3.2 U3.29 | length 51.9
  Top Layer w0.2: v2(10.7,15.4) R3.2 R3.2@10.725,16.175 ; U3.29 48.393,31.533 49.968,31.533 v2(49.985,31.515)
  Layer 2 w0.2: v2(30.85,29.9) 30.85,30.35 33.1,32.6 49.166,32.6 49.218,32.652 49.632,32.652 49.985,32.299 v2(49.985,31.515)
  Bottom Layer w0.2: v2(10.7,15.4) 11.2,14.9 15.607,14.9 19.902,19.194 19.902,21.604 24.264,25.966 26.916,25.966 v2(30.85,29.9)
MISO: LCD.5 MB1.P14 U1.9 | length 47.3
  Top Layer w0.2: U1.9@4.2,26.8 7.119,26.8 7.219,26.7 v2(7.3,26.7) ; v2(21.5,8.3) 21.5,11.145
  Layer 2 w0.2: v2(21.5,11.4) 26.845,11.4 28.195,12.75 LCD.5@28.5,12.75
  Bottom Layer w0.2: v2(7.3,26.7) 7.293,26.7 6.75,26.157 6.75,15.748 11.248,11.25 21.269,11.25 21.419,11.4 v2(21.5,11.4) ; v2(21.5,8.3) 21.5,2.505 MB1.P14
MOSI: LCD.6 MB1.P15 U1.8 | length 52.2
  Top Layer w0.2: U1.8@4.1,28 v2(7.3,28)
  Layer 1 w0.2: v2(20.3,7) 20.3,10.1 20.8,10.6 23.495,10.6 LCD.6@25.895,13
  Layer 2 w0.2: LCD.6@25.895,12.995 LCD.6@25.9,13
  Bottom Layer w0.2: v2(7.3,28) 6.3,27 6.3,15.01 10.41,10.9 16.231,10.9 16.381,10.75 23.655,10.75 25.895,12.99 LCD.6@25.895,13 ; MB1.P15@20.2,3.6 20.3,3.7 v2(20.3,7)
NetC12_2: C12.2 JX1.P L1.2 | length 3.6
  Top Layer w0.254: L1.2 44.787,37.812 44.787,38.813 44.775,38.825 44.775,41.327 JX1.P
NetC18_1: C18.1 J1.5 R9.1 U1.11 U3.44 | length 78
  Top Layer w0.2: U1.11@4.2,24.2 8.6,24.2 v2(9.4,25) ; R9.1@40.6,36.2 40.6,36.15 40.7,36.05 40.75,36.05 40.943,35.857 41.343,35.857 v2(41.4,35.8)
  Top Layer w0.3: C18.1 R9.1 40.59,36.21 40.59,34.81 U3.44@40.6,34.8
  Layer 1 w0.2: v2(9.4,25) 10.177,24.223 10.342,24.223 10.519,24.4 v2(11.8,24.4) ; v2(17.9,23.2) 18.7,22.4 v2(23,22.4) ; v2(33.108,24.615) 33.108,31.408 33.5,31.8 39,31.8 40.6,33.4 40.6,35.033 41.367,35.8 v2(41.4,35.8) ; v2(35.1,20.7) 35.1,18 38.2,14.9 39.1,14.9 40.332,13.668 48.532,13.668 J1.5 J1.5@50.2,12
  Layer 2 w0.2: v2(11.8,24.4) 16.7,24.4 v2(17.9,23.2) ; v2(23,22.4) 30.893,22.4 v2(33.108,24.615)
  Bottom Layer w0.2: v2(33.108,24.615) 34.104,23.619 34.104,21.696 v2(35.1,20.7)
NetC19_1: C19.1 L2.2 U3.11 | length 4.8
  Top Layer w0.3: U3.11 44.225,22.275 45.1,21.4 45.1,20.7 C19.1@45.2,20.6 ; C19.1 45.1,20.55 45.6,20.05 L2.2@45.6,19
NetC20_1: C20.1 C21.1 L3.1 U3.10 | length 12.1
  Top Layer w0.3: U3.10 43.59,23.165 43.59,22.515 42.9,21.825 42.9,21.011 42.9,19.604 42.9,18.196 44.025,17.071 L3.1@44.025,16.512 ; C20.1 44.05,14.15 C20.1@44.025,14.15 ; L3.1 L3.1@44.025,16.512 ; C21.1@45.593,14 44.175,14 C20.1@44.025,14.15 ; C20.1@44.025,14.15 L3.1@44.025,16.512
NetC23_1: C23.1 L4.2 U3.54 | length 4.3
  Top Layer w0.3: C23.1 34.7,28.7 L4.2@34.9,28.5 ; C23.1 34.725,30.325 37.05,30.325 U3.54
NetC24_1: C24.1 L5.2 U3.53 | length 4.2
  Top Layer w0.3: C24.1 34.7,32.9 L5.2 ; C24.1 34.7,31.45 35.2,30.95 U3.53
NetL3_2: L3.2 U3.13 | length 7.4
  Top Layer w0.3: U3.13 45.425,22.126 45.851,21.7 46.111,21.7 46.847,20.963 L3.2@46.847,16.513
NetLED1_A: LED1.A R1.1 | length 1.9
  Top Layer w0.25: LED1.A@36.8,40.5 38.6,40.5 R1.1
P0: MB1.P0 U1.38 | length 45.2
  Top Layer w0.2: v2(20.1,34.5) 21.5,34.5 U1.38@21.6,34.4
  Layer 1 w0.2: v2(20.1,34.5) 23.5,34.5 32,26 32,23.822 v2(33.254,22.568)
  Bottom Layer w0.2: v2(33.254,22.568) 33.254,20.594 34.148,19.7 34.601,19.7 38.601,15.7 42.8,15.7 47.595,10.905 MB1.P0
P1: MB1.P1 U1.31 | length 30.7
  Top Layer w0.2: U1.31@21.5,25.5 22.819,25.5 22.919,25.6 v2(23,25.6)
  Layer 1 w0.2: v2(23,25.6) 23.95,26.55 28.545,26.55 30.25,24.845 30.25,23.097 31.15,22.197 31.15,20.065 33.3,17.915 v2(33.3,15.3)
  Bottom Layer w0.2: v2(33.3,15.3) 33.357,15.243 33.357,14.938 34.75,13.545 34.75,9.585 MB1.P1
P2: MB1.P2 U1.7 | length 41.2
  Top Layer w0.2: U1.7@4.4,29.3 7.119,29.3 7.219,29.2 v2(7.3,29.2)
  Bottom Layer w0.2: v2(7.3,29.2) 5.95,27.85 5.95,14.865 10.265,10.55 16.086,10.55 16.386,10.25 22.705,10.25 MB1.P2
P3: MB1.P3 U1.39 | length 48.6
  Top Layer w0.2: U1.39 22.86,35.64 v2(23.2,35.3)
  Layer 1 w0.2: v2(23.2,35.3) 32.5,26 v2(32.5,25.5) v2@32.5,25.468
  Bottom Layer w0.2: v2(32.5,25.5) 32.5,24.2 33.754,22.946 33.754,21.046 35.839,18.961 35.839,18.957 36.161,18.635 36.165,18.635 38.75,16.05 43.091,16.05 50.845,8.296 50.845,5.604 50.8,5.559 50.8,2.485 MB1.P3
P4: MB1.P4 U1.35 | length 43.3
  Top Layer w0.2: U1.35@21.6,30.6 22.9,30.6 v2(23.9,29.6)
  Layer 1 w0.2: v2(23.9,29.6) 25.4,28.1 29.405,28.1 31.65,25.855 31.65,23.677 32.7,22.627 v2(32.7,21.6)
  Bottom Layer w0.2: v2(32.7,21.6) 32.7,20.6 34,19.3 34.3,19.3 38.3,15.3 42.5,15.3 44.015,13.785 44.015,2.85 MB1.P4
P6: MB1.P6 U1.34 | length 41.6
  Top Layer w0.2: U1.34@21.6,29.3 21.7,29.2 23.5,29.2 v2(23.9,28.8)
  Layer 1 w0.2: v2(23.9,28.8) 25,27.7 29.1,27.7 31.3,25.5 31.3,23.532 32.2,22.632 32.2,20.5 34.7,18 34.7,16.3 v2(35.4,15.6)
  Bottom Layer w0.2: v2(35.4,15.6) 35.407,15.6 35.707,15.3 37.31,15.3 38.01,14.6 41.3,14.6 41.875,14.025 MB1.P6
P7: MB1.P7 U1.33 | length 40.7
  Top Layer w0.2: U1.33@21.7,28.1 v2(23.6,28.1)
  Layer 1 w0.2: v2(23.6,28.1) 24.35,27.35 28.8,27.35 30.95,25.2 30.95,23.387 31.85,22.487 31.85,20.355 34.35,17.855 34.35,16.15 34.7,15.8 v2(34.7,15.3)
  Bottom Layer w0.2: v2(34.7,15.3) 35.1,14.9 37.215,14.9 37.865,14.25 40.65,14.25 41.4,13.5 41.4,6.369 40.605,5.574 MB1.P7
P8: MB1.P8 U1.29 | length 30.3
  Top Layer w0.2: U1.29@21.8,23 v2(23.4,23)
  Layer 1 w0.2: v2(23.4,23) 29.226,23 30.426,21.8 30.426,19.598 32.1,17.924 32.1,16.7 31.8,16.4 v2(31.8,15.3)
  Bottom Layer w0.2: v2(31.8,15.3) 31.8,15.293 32.427,14.666 32.427,10.373 34.135,8.665 34.135,2.57 MB1.P8
P9: MB1.P9 U1.28 | length 30.6
  Top Layer w0.2: U1.28@21.5,21.7 U1.28@21.6,21.6 ; U1.28@21.8,21.8 22.1,21.5 v2(24.3,21.5)
  Layer 1 w0.2: v2(24.3,21.5) 25.45,22.65 29.081,22.65 30.076,21.655 30.076,19.453 31.6,17.929 31.6,16.9 31,16.3 v2(31,15.6)
  Bottom Layer w0.2: v2(31,15.6) 31,14.75 32.063,13.687 32.063,13.461 32.073,13.451 32.073,12.073 31.8,11.8 31.8,10.5 32.985,9.315 MB1.P9
P10: MB1.P10 U1.24 | length 29.1
  Top Layer w0.2: U1.24@17.3,19.1 17.6,19.4 v2(17.6,20.7)
  Layer 2 w0.2: v2(17.6,20.7) 17.6,20.619 17.741,20.477 17.741,20.464 22.255,15.95 27.15,15.95 v2(28,15.1)
  Bottom Layer w0.2: v2(28,15.1) 28.695,15.1 29.897,13.898 29.897,11.908 31.715,10.09 MB1.P10
P12: MB1.P12 U1.12 | length 39.8
  Top Layer w0.2: U1.12@4,22.9 5.183,22.9 5.583,23.3 v2(7.6,23.3)
  Layer 2 w0.2: v2(7.6,23.3) 12.8,23.3 15.1,21 15.9,21 22.4,14.5 27.033,14.5 27.15,14.383 27.15,13.95 v2(27.2,13.9)
  Bottom Layer w0.2: v2(27.2,13.9) 27.2,10.739 29.255,8.684 29.255,2.53 MB1.P12
RF_Output: C11.2 L1.1 U3.37 | length 2.3
  Top Layer w0.225: L1.1 44.825,36.8 44.825,36.475 C11.2 U3.37
SCK: LCD.4 MB1.P13 U1.10 | length 50.3
  Top Layer w0.2: U1.10@4.2,25.5 6.8,25.5 v2(7.3,26) ; v2(19.5,11.75) 21.143,11.75 21.293,11.9 29.885,11.9 LCD.4
  Layer 2 w0.2: v2(19.5,11.75) 20.815,10.435 20.815,10.285 v2(22.5,8.6)
  Bottom Layer w0.2: v2(7.3,26) 7.3,25.919 7.1,25.719 7.1,15.893 11.243,11.75 v2(19.5,11.75) ; v2(22.5,8.6) 22.5,5.859 22.825,5.534 MB1.P13
SCL: MB1.P19 U1.5 | length 35.2
  Top Layer w0.2: U1.5@4.2,31.8 6.919,31.8 7.019,31.9 v2(7.1,31.9)
  Bottom Layer w0.2: v2(7.1,31.9) 5.25,30.05 5.25,14.575 10.125,9.7 MB1.P19
SDA: MB1.P20 U1.4 | length 36
  Top Layer w0.2: U1.4@4,33.2 4.2,33 v2(6.9,33)
  Bottom Layer w0.2: v2(6.9,33) 4.9,31 4.9,14.43 8.855,10.475 MB1.P20
SDCS: LCD.10 U1.32 | length 17.4
  Top Layer w0.2: v2(19,26.25) 19.45,26.7 20.043,26.7 20.484,26.7 20.534,26.75 U1.32@21.5,26.75
  Layer 1 w0.2: LCD.10 15.9,13.155 15.9,17.669 15.75,17.819 v2(15.75,17.9)
  Bottom Layer w0.2: v2(15.75,17.9) 15.8,17.95 15.8,21.807 19,25.007 v2(19,26.25)
SW1: C7.1 MB1.P5 R5.1 S1.4 U1.21 | length 67.1
  Top Layer w0.2: v2(13.5,20.9) 13.5,19.1 U1.21@13.6,19 ; R5.1 v2(16.4,17.2)
  Top Layer w0.3: U1.21@13.6,18.9 13.81,18.69 13.81,18.09 14,17.9 14,17.5 14.1,17.4 14.1,17.35 14.25,17.2 C7.1 R5.1
  Layer 2 w0.2: v2(16.4,17.2) 16.45,17.2 18.55,15.1 v2(18.6,15.1)
  Bottom Layer w0.2: S1.4 3.75,32.6 4.65,33.5 10,33.5 13.5,30 v2(13.5,20.9) ; v2(18.6,15.1) 20.2,16.7 36.405,16.7 38.155,14.95 42.15,14.95 42.745,14.355 42.745,3.355 MB1.P5@43,3.1
SW2: C8.1 MB1.P11 R6.1 S2.4 U1.20 | length 66.5
  Top Layer w0.2: 12,17.9 v2(12.6,17.9)
  Top Layer w0.3: C8.1 12,17.9 12,18.8 U1.20@12.3,19.1 ; C8.1@12.1,17.2 R6.1
  Layer 2 w0.2: v2(12.6,17.9) 13.85,16.65 16.15,16.65 v2(17.4,15.4) ; v2(32.2,30) 33.5,31.3 v2(38.6,31.3)
  Bottom Layer w0.2: MB1.P11@30.4,3 30.4,10.91 29.533,11.777 29.533,13.451 28.584,14.4 18.4,14.4 v2(17.4,15.4) 24.646,22.646 24.954,22.646 32.143,29.836 32.143,29.943 v2(32.2,30) ; v2(38.6,31.3) 42.325,31.3 42.825,31.8 42.95,31.8 43.5,32.35 S2.4
T_SWCLK: J1.2 U3.2 | length 23.1
  Top Layer w0.2: v2(37.178,21.863) 37.906,21.863 38.663,22.619 38.663,22.637 38.825,22.8 U3.2
  Layer 1 w0.2: v2(37.178,21.863) 39.218,19.822 39.218,15.804 40.522,14.5 46.75,14.5 48.75,16.5 48.75,17.75 49.025,18.025 J1.2 50.225,18.025 J1.2@50.25,18
T_SWDIO: J1.3 R7.1 U3.1 | length 24.9
  Top Layer w0.2: v2(36.496,22.6) 36.577,22.6 36.662,22.515 37.94,22.515 38.17,22.745 38.17,23.145 U3.1 ; R7.1 48.125,16.025 50.075,16.025 J1.3@50.1,16
  Layer 1 w0.2: v2(36.496,22.6) 36.496,21.004 38.868,18.632 38.868,15.659 40.378,14.15 46.895,14.15 48.77,16.025 50.075,16.025 J1.3@50.1,16
TFTCS: LCD.7 U1.23 | length 14.4
  Top Layer w0.2: U1.23@15.9,19.1 16.4,19.6 16.4,21.119 16.5,21.219 v2(16.5,21.3)
  Layer 1 w0.2: LCD.7@23.25,13 23.443,13.193 23.443,15.193 v2(23.5,15.25)
  Layer 2 w0.2: v2(16.5,21.3) 16.5,21.093 22.343,15.25 v2(23.5,15.25)
TFTRESET: LCD.8 U1.25 | length 7.3
  Top Layer w0.2: U1.25 18.59,16.153 20.605,14.138 20.605,12.895 LCD.8@20.75,12.75
VBAT: C1.1 C2.1 C4.2 C5.1 C9.1 C10.1 C13.1 C14.1 C15.1 C16.1 C17.1 C22.1 J1.4 L2.1 L4.1 L5.1 LCD.1 LED2.4 MB1.Vcc R1.2 R2.2 R5.2 R6.2 R7.2 R8.2 R9.2 U1.2 U2.2 U2.4 U3.3 U3.4 U3.6 U3.7 U3.55 | length 79.9
  Top Layer w0.2: C13.1 40.663,16.626 ; C14.1 C14.1@42.225,16.626
  Top Layer w0.3: v2(9.5,15.4) R8.2@9.5,16.2 ; v2(13.1,15.4) R6.2 ; v2(15.4,15.4) R5.2@15.4,16.2 ; v2(24,24.5) 24.7,25.2 U2.4 ; v2(24.75,17.25) 24.8,17.2 C4.2 ; C4.2 LED2.4@25.6,19.1 ; U2.4@26.9,25.1 27.2,24.8 C5.1 29.8,24.5 29.8,24.2 v2(29.1,23.5) ; v4(27,29.9) U2.2 ; L5.1 v2(33.2,34.2) ; L4.1 33.663,28.19 33.663,27.773 33.863,27.573 v3(33.863,27.491) ; v3@34,26.4 34.106,26.4 34.206,26.5 C22.1 35.292,26.508 35.292,27.491 35.991,28.19 35.991,29.263 36.443,29.715 37.04,29.715 U3.55 ; v3(36.389,19.185) 36.446,19.242 36.842,19.242 37.825,20.225 37.825,20.575 38.417,21.167 38.417,21.182 39.425,22.19 U3.3 ; v3(37.6,18.7) 37.6,18.619 37.8,18.419 37.8,17.8 C10.1@37.9,17.7 ; C10.1 C9.1 39.15,17.85 40.128,17.85 40.579,18.301 40.579,21.665 41.19,22.276 41.19,23.165 U3.6 ; v2(38.4,36.5) 38.6,36.3 R9.2 ; v2(38.5,19.75) 38.5,19.804 38.676,19.98 38.676,20.169 39.286,20.169 C15.1 39.468,20.351 39.468,21.068 v3(39.5,21.1) 39.5,21.11 40.025,21.635 U3.4 ; R1.2 v2@38.7,43.2 ; 40.663,16.626 41.225,17.188 v3(41.225,17.77) ; C16.1 41.75,21.25 42.024,21.25 42.45,20.824 42.45,19.79 42.45,16.851 42.225,16.626 ; C16.1@41.813,21.412 41.813,23.188 U3.7 ; L2.1 43.95,18.05 v2(44.25,17.75) ; R7.2 48.15,15 49.075,14.075 50.025,14.075 J1.4@50.1,14
  Top Layer w0.5: v2(1.5,29.5) 1.5,28.65 1.55,28.6 R2.2 ; C1.1 1.975,35.371 C2.1@2.05,35.446 ; U1.2 5.64,35.64 v2(6.25,36.25)
  Top Layer w0.7: 40.663,16.626 42.225,16.626
  Layer 2 w0.508: 14.25,7.295 14.595,6.95
  Layer 2 w0.762: 14.25,7.295 14.25,11.75
  Bottom Layer w0.3: MB1.Vcc@13.2,7.8 MB1.Vcc@14.3,7.8
  Bottom Layer w0.508: MB1.Vcc@11.4,4.1 11.4,5.514 11.745,5.859 13.059,5.859 MB1.Vcc@14.7,7.5 ; MB1.Vcc@16.5,6.9 16.5,6.531 17.132,5.899 17.342,5.899 17.745,5.496 MB1.Vcc@17.745,2.45
  other v2: 38.7,43.2
  other v3: 33.975,26.35
Vbus: C6.1 U2.3 USB1.A4_B9 USB1.B4_A9 | length 14.8
  Top Layer w0.5: U2.3 24.8,31.4 25.1,31.4 25.2,31.5 C6.1 ; C6.1@25.3,33.7 25.4,33.6 26.8,33.6 v2(27,33.8) ; v2(27.7,35.9) USB1.B4_A9 ; v2(31.3,34.9) 32.45,36.05 32.45,36.8 USB1.A4_B9
  Bottom Layer w0.5: v2(27,33.8) 27.7,33.8 ; v2(27.7,35.9) 27.7,33.8 ; v2(31.3,34.9) 30.2,33.8 27.7,33.8
pads on no net: LCD.2 LCD.11 LED2.1 MB1. S1.2 S1.3 S2.2 S2.3 U1.15 U1.16 U1.26 U1.27 U1.36 U1.37 U3.5 U3.8 U3.9 U3.14 U3.15 U3.16 U3.17 U3.18 U3.19 U3.20 U3.21 U3.22 U3.23 U3.24 U3.25 U3.26 U3.27 U3.31 U3.32 U3.33 U3.34 U3.40 U3.41 U3.42 U3.45 U3.48 U3.49 U3.50 U3.51 U3.57 U3.58 U3.59 U3.60 U3.61 U3.62 U3.63 U3.64 USB1. USB1.A5 USB1.A8 USB1.B5 USB1.B8 USB1.SH1 USB1.SH2 USB1.SH3 USB1.SH4

## Polygon pours and split planes (outlines as drawn)
VBAT on Layer 2 "VBAT" (solid, pour order 28): 0,10.8 51.6,10.8 51.6,41.299 51.6,41.3 ccw(c48.5,41.3) 48.5,44.4 3.1,44.4 ccw(c3.1,41.3) 0.002,41.422 0,41.4
GND on Layer 1 "GND" (solid, remove dead copper, pour order 30): 0,10.7 0.1,10.6 51.6,10.6 51.6,41.299 51.6,41.3 ccw(c48.5,41.3) 48.5,44.4 3.1,44.4 ccw(c3.1,41.3) 0.002,41.422 0,41.4
GND on Top Layer "GND" (solid, remove dead copper, pour order 29): 0,9.4 51.6,9.4 51.6,41.299 51.6,41.3 ccw(c48.5,41.3) 48.5,44.4 3.1,44.4 ccw(c3.1,41.3) 0.002,41.422 0,41.4
GND on Bottom Layer "GND" (solid, remove dead copper, pour order 26): 0,9.4 51.6,9.4 51.6,41.299 51.6,41.3 ccw(c48.5,41.3) 48.5,44.4 3.1,44.4 ccw(c3.1,41.3) 0.002,41.422 0,41.4

## Keep-outs
Top Layer:
  circle w0.254: c32.99,37.92 r0.2
  circle w0.254: c27.21,37.92 r0.2
Layer 1:
  circle w0.254: c32.99,37.92 r0.2
  circle w0.254: c27.21,37.92 r0.2
Layer 2:
  circle w0.254: c32.99,37.92 r0.2
  circle w0.254: c27.21,37.92 r0.2
Bottom Layer:
  circle w0.254: c32.99,37.92 r0.2
  circle w0.254: c27.21,37.92 r0.2

## Other copper
Top Layer:
  region net VBAT: 1.475,36.075 1.475,34.05 1.709,34.05 2.859,35.2 4,35.2 4,36.075

## Silkscreen, mask and mechanical layers (free items; w line width, h text height)
Top Overlay:
  region: 2257 vertices and 1 holes, not listed, extent 1.382,12.471 6.892,17.433
  text "'.<ProjectName>' - rev'.<Revision>'" at 1,10.75 h0.8
Bottom Overlay:
  region: 21.132,41.599 21.132,39.668 24.228,39.668 24.228,43.189 22.865,43.189 22.865,40.179 22.496,40.179 22.496,41.883 21.132,41.883 21.132,41.627
  region: 24.654,43.132 24.654,39.327 24.995,39.327 24.995,43.53 24.654,43.53 24.654,43.161
  region: 13.834,42.337 13.834,43.53 13.464,43.53 13.464,39.327 13.834,39.327 13.834,42.309
  region: 16.106,39.668 17.298,39.668 17.298,39.696 17.327,39.696 17.327,43.189 14.26,43.189 14.26,41.826 15.623,41.826 15.623,42.678 15.992,42.678 15.992,40.179 15.623,40.179 15.623,41.031 14.26,41.031 14.26,39.668 16.077,39.668
  region: 16.049,39.242 13.919,39.242 13.919,38.872 17.242,38.872 17.242,38.901 17.27,38.901 17.27,39.213 17.242,39.213 17.242,39.242 16.077,39.242
  region: 19.883,43.189 19.428,43.189 19.428,42.309 17.696,42.309 17.696,39.242 19.059,39.242 19.059,41.4 19.4,41.4 19.4,41.372 19.428,41.372 19.428,39.668 20.792,39.668 20.792,43.189 19.911,43.189
  region: 19.4,38.759 19.4,38.787 17.355,38.787 17.355,38.446 19.4,38.446 19.4,38.73
  region: 19.996,39.242 19.514,39.242 19.514,38.872 24.569,38.872 24.569,39.242 20.025,39.242
  region: 21.587,42.678 21.558,42.678 21.558,43.956 18.633,43.956 18.633,43.104 18.122,43.104 18.122,43.956 13.919,43.956 13.919,43.615 17.781,43.615 17.781,42.763 18.974,42.763 18.974,43.615 21.218,43.615 21.218,42.337 22.439,42.337 22.439,43.615 24.569,43.615 24.569,43.956 22.07,43.956 22.07,42.678 21.615,42.678
  text "lhc.net.br" at 50.75,40.5 h0.8 r90
  text "011000100110" at 13.1,38.9 h0.7
Mechanical 1:
  the board outline again, w0.254

## Text inside footprints (layer, text, board x,y; h text height)
LCD: Bottom Overlay "VIN" at 38.302,15 h1 r270; Bottom Overlay "D/C" at 17.982,15 h1 r270; Bottom Overlay "GND" at 33.222,15 h1 r270; Bottom Overlay "SCK" at 30.682,15 h1 r270; Bottom Overlay "TFTCS" at 23.062,15 h1 r270; Bottom Overlay "MISO" at 28.396,15 h1 r270; Bottom Overlay "MOSI" at 25.602,15 h1 r270; Bottom Overlay "RST" at 20.522,15 h1 r270; Bottom Overlay "3v3 - Out" at 35.762,15 h1 r270; Bottom Overlay "BKLIGHT" at 13.156,15 h1 r270; Bottom Overlay "SDCS" at 15.442,15 h1 r270
MB1: Top Layer "1" at 35.1,-0.04 h1.52; Top Layer "2" at 23.69,-0.04 h1.52; Top Layer "0" at 45.34,-0.04 h1.52; Top Layer "Vcc" at 12.31,-0.04 h1.52; Top Layer "GND" at 2.1,-0.04 h1.52; Bottom Layer "2" at 28.31,-0.04 h1.52; Bottom Layer "GND" at 6.66,-0.04 h1.52; Bottom Layer "Vcc" at 16.9,-0.04 h1.52; Bottom Layer "1" at 39.69,-0.04 h1.52; Bottom Layer "0" at 49.9,-0.04 h1.52; Bottom Solder "GND" at 6.66,-0.04 h1.52; Bottom Solder "Vcc" at 16.9,-0.04 h1.52; Bottom Solder "2" at 28.31,-0.04 h1.52; Bottom Solder "0" at 49.9,-0.04 h1.52; Bottom Solder "1" at 39.69,-0.04 h1.52; Top Solder "0" at 45.34,-0.04 h1.52; Top Solder "GND" at 2.1,-0.04 h1.52; Top Solder "2" at 23.69,-0.04 h1.52; Top Solder "Vcc" at 12.31,-0.04 h1.52; Top Solder "1" at 35.1,-0.04 h1.52